# Altium PCB ESC_4layers.PcbDoc
Units mm, origin at the board's own origin, x right, y up, seen from the top; angles counter-clockwise.
Board outline 12.4 x 23 mm, 4 copper layers (Top Layer, Signal 1, Signal 2, Bottom Layer), stack 1.57 mm thick; 62 components, 45 nets, 240 pads, 90 vias.
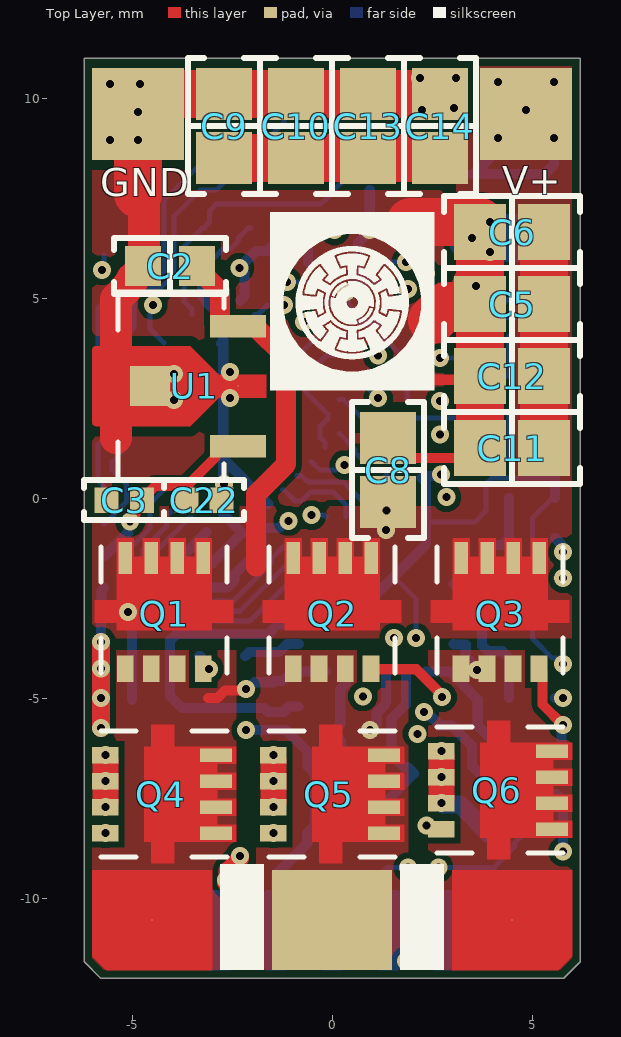
[diagram p0: Top Layer view]
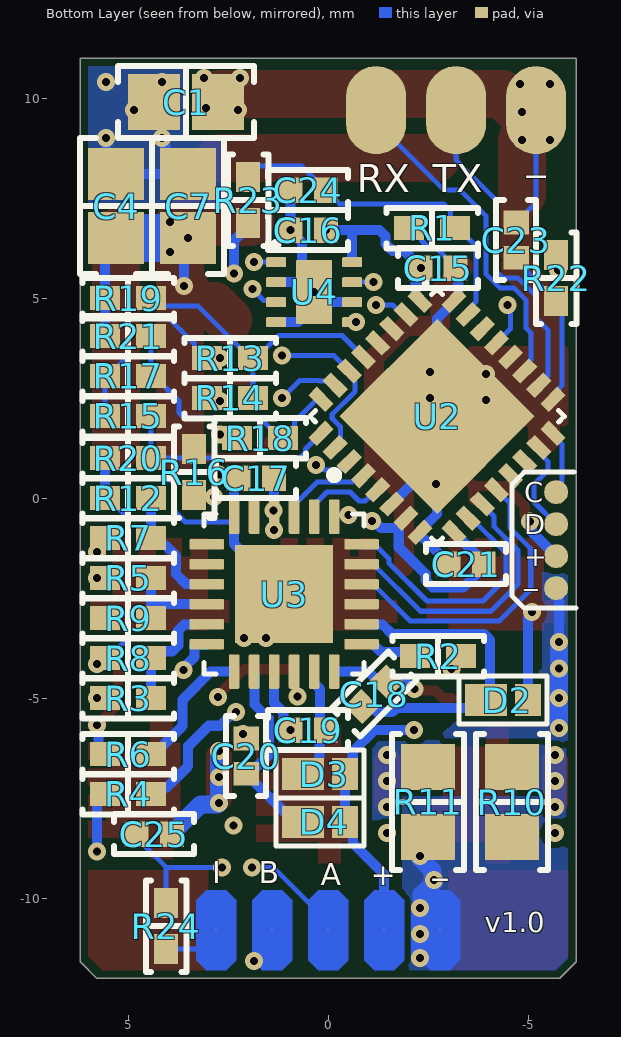
[diagram p1: Bottom Layer view, seen from below]
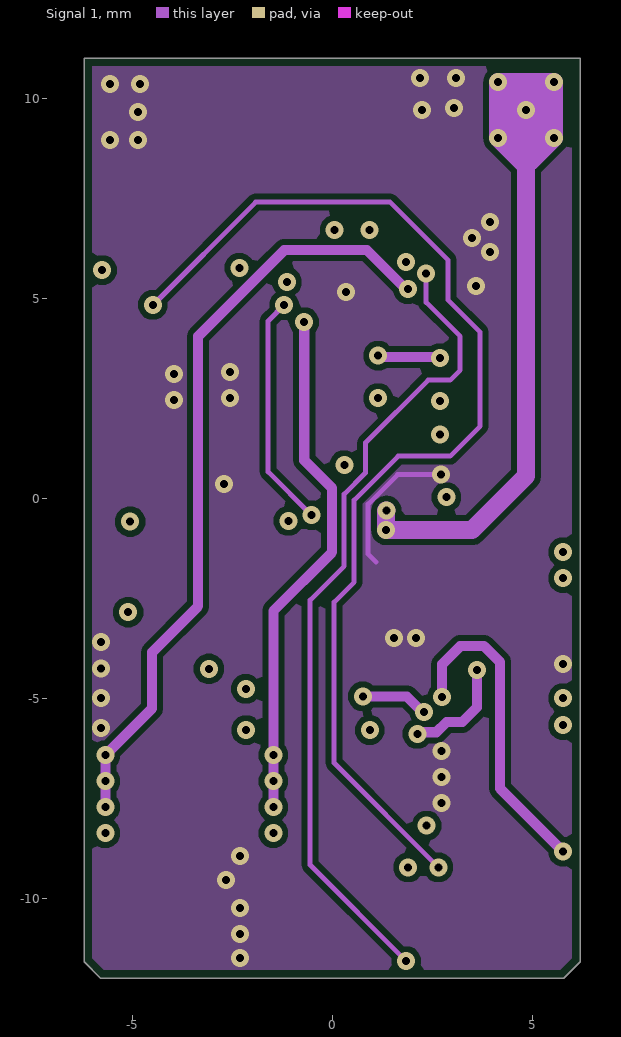
[diagram p2: Signal 1]
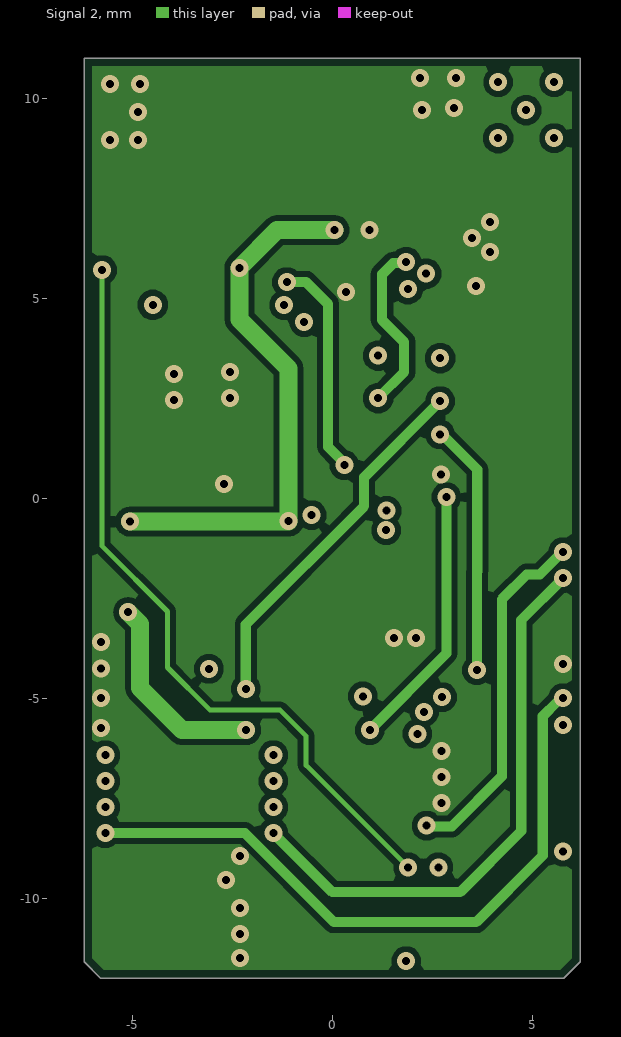
[diagram p3: Signal 2]

## Layer stack, top to bottom
Top Solder: solder mask 0.01, Solder Resist, Dk 3.5
Top Layer: signal copper 0.035
Dielectric 2: prepreg 0.2, PP-006, Dk 4.1
Signal 1: signal copper 0.0175
Core: core 1.065, FR-4, Dk 4.8
Signal 2: signal copper 0.0175
Dielectric 3: prepreg 0.2, PP-006, Dk 4.1
Bottom Layer: signal copper 0.035
Bottom Solder: solder mask 0.01, Solder Resist, Dk 3.5

## Board outline
-5.792,-12 -6.2,-11.592 -6.2,11 6.2,11 6.2,-11.592 5.792,-12

## Design rules (kind name [scope] priority, off if disabled: settings)
BoardOutlineClearance [OnLayer('Top Layer') Or (OnLayer('Bottom Layer')) Or (OnLayer('VBAT')) Or (OnLayer('Signal 1')) Or (OnLayer('Signal 2')) Or (OnLayer('Power')) Or (OnLayer('GND 1')) Or (OnLayer('GND 2')) Or (OnLayer('Multi-Layer'))] p1: gap=0.2 ignorepadtopadclearanceinfootprint=FALSE
Clearance "PolyGOn Pour CLearance" [InPolyGon] p1: gap=0.15 ignorepadtopadclearanceinfootprint=FALSE
Clearance [All] p2: gap=0.089 ignorepadtopadclearanceinfootprint=FALSE except(0.127: Arc-Via Track-Via SMDPad-Via THPad-Via Via-Via Via-Fill Via-Poly Via-Region Via-Text; 0.25: Arc-Hole Track-Hole SMDPad-Hole THPad-Hole Via-Hole Fill-Hole Poly-Hole Region-Hole Text-Hole)
HoleSize [All] p1: absolutevalues=TRUE maxlimit=6.3 minlimit=0.2 maxpercent=80.000 minpercent=20.000
PolygonConnect PolygonRelief [IsPolygon and not (IsNamedPolygon('PolygonDirect'))] p1: thpad.connectstyle=Relief thpad.reliefconductorwidth=0.254 thpad.reliefentries=4 thpad.polygonreliefangle="90 Angle" thpad.airgapwidth=0.254 smdpad.connectstyle=Relief smdpad.reliefconductorwidth=0.254 smdpad.reliefentries=4 smdpad.polygonreliefangle="90 Angle" smdpad.airgapwidth=0.254 via.connectstyle=Direct via.reliefconductorwidth=0.254 via.reliefentries=4 via.polygonreliefangle="90 Angle" via.airgapwidth=0.254
PolygonConnect [All] p2: connectstyle=Direct reliefconductorwidth=0.254 reliefentries=4 polygonreliefangle="90 Angle" airgapwidth=0.254
RoutingVias [All] p1: holewidth=0.3 width=0.55 viastyle="Through Hole" minholewidth=0.2 minwidth=0.45 maxholewidth=0.7 maxwidth=1.27
SolderMaskExpansion [All] p1: expansion=0.102 istentingtop=FALSE
Width [All] p1: maxlimit=5 minlimit=0.127 preferedwidth=0.254
29 further rules are at their usual default settings.

## Classes and differential pairs
component class U_STM32: C15 C16 C23 C24 C25 R1 R22 R23 R24 U2
component class U_Half_Bridge_Driver: C17 C18 C19 C20 C21 D2 D3 D4 Q1 Q2 Q3 Q4 Q5 Q6 R2 R3 R4 R5 R6 R7 R8 R9 R10 R11 R12 R13 R14 R15 R16 R17 R18 R19 R20 R21 U3 U4
component class U_3V3_LDO: C2 C3 C22 U1

## Components (designator, comment, footprint, x,y, rotation, side; value= is the part's Value field where it differs from the comment)
C1 "22 µF" "CAP 0805_2012" 3.55,9.9 r0 bottom
C2 "0.1µF" "CAP 0603_1608" -4.05,5.8 r180 top
C3 "0.1 µF" "CAP 0402_1005" -5.2,-0.05 r0 top
C4 "22 µF" "CAP 0805_2012" 5.3,7.3 r90 bottom
C5 "22 µF" "CAP 0805_2012" 4.5,4.85 r0 top
C6 "22 µF" "CAP 0805_2012" 4.5,6.65 r0 top
C7 "22 µF" "CAP 0805_2012" 3.5,7.3 r90 bottom
C8 "22 µF" "CAP 0805_2012" 1.4,0.7 r270 top
C9 "22 µF" "CAP 0805_2012" -2.7,9.3 r270 top
C10 "22 µF" "CAP 0805_2012" -0.9,9.3 r270 top
C11 "22 µF" "CAP 0805_2012" 4.5,1.25 r0 top
C12 "22 µF" "CAP 0805_2012" 4.5,3.05 r0 top
C13 "22 µF" "CAP 0805_2012" 0.9,9.3 r270 top
C14 "22 µF" "CAP 0805_2012" 2.7,9.3 r270 top
C15 "0.1 µF" "CAP 0402_1005" -2.75,5.75 r0 bottom
C16 "0.1 µF" "CAP 0402_1005" 0.5,6.7 r180 bottom
C17 "0.1 µF" "CAP 0402_1005" 1.8,0.5 r180 bottom
C18 "0.1 µF" "CAP 0402_1005" -1.15,-4.9 r135 bottom
C19 "0.1 µF" "CAP 0402_1005" 0.5,-5.8 r0 bottom
C20 "0.1 µF" "CAP 0402_1005" 2.05,-6.45 r90 bottom
C21 "0.1 µF" "CAP 0402_1005" -3.45,-1.65 r0 bottom
C22 "0.1 µF" "CAP 0402_1005" -3.2,-0.05 r180 top
C23 "0.1 nF" "CAP 0402_1005" -4.7,6.45 r90 bottom
C24 "0.1 nF" "CAP 0402_1005" 0.5,7.7 r0 bottom
C25 "0.1 nF" "CAP 0402_1005" 4.35,-8.4 r180 bottom
D2 "Diode" "Diode DFN1608D-2 (SOD1608)" -4.375,-5.05 r180 bottom
D3 "Diode" "Diode DFN1608D-2 (SOD1608)" 0.2,-6.9 r180 bottom
D4 "Diode" "Diode DFN1608D-2 (SOD1608)" 0.2,-8.1 r180 bottom
Q1 "NVTFS5C680NL" NVTFS015N04CTAG -4.2,-2.8 r90 top
Q2 "NVTFS5C680NL" NVTFS015N04CTAG 0,-2.8 r90 top
Q3 "NVTFS5C680NL" NVTFS015N04CTAG 4.2,-2.8 r90 top
Q4 "NVTFS5C680NL" NVTFS015N04CTAG -4.2,-7.4 r0 top
Q5 "NVTFS5C680NL" NVTFS015N04CTAG 0,-7.4 r0 top
Q6 "NVTFS5C680NL" NVTFS015N04CTAG 4.2,-7.3 r0 top
R1 "10k" "RES 0402_1005" -2.6,6.75 r180 bottom
R2 "22 Ohm" "RES 0402_1005" -2.75,-3.95 r180 bottom
R3 "22 Ohm" "RES 0402_1005" 5,-5 r0 bottom
R4 "22 Ohm" "RES 0402_1005" 5,-7.4 r0 bottom
R5 "22 Ohm" "RES 0402_1005" 5,-2 r0 bottom
R6 "22 Ohm" "RES 0402_1005" 5,-6.4 r0 bottom
R7 "22 Ohm" "RES 0402_1005" 5,-1 r0 bottom
R8 "10k" "RES 0402_1005" 5,-4 r0 bottom
R9 "10k" "RES 0402_1005" 5,-3 r0 bottom
R10 "15 mOhms" "RES 0805_2012" -4.6,-7.6 r90 bottom
R11 "15 mOhms" "RES 0805_2012" -2.5,-7.6 r90 bottom
R12 "10k" "RES 0402_1005" 5,0 r0 bottom
R13 "33 kOhms" "RES 0402_1005" 2.45,3.5 r180 bottom
R14 "33 kOhms" "RES 0402_1005" 2.45,2.5 r0 bottom
R15 "33 kOhms" "RES 0402_1005" 5,2.05 r180 bottom
R16 "33 kOhms" "RES 0402_1005" 3.35,0.65 r270 bottom
R17 "33 kOhms" "RES 0402_1005" 5,3.05 r180 bottom
R18 "33 kOhms" "RES 0402_1005" 1.7,1.5 r0 bottom
R19 "10 kOhms" "RES 0402_1005" 5,5 r180 bottom
R20 "10 kOhms" "RES 0402_1005" 5,1 r180 bottom
R21 "10 kOhms" "RES 0402_1005" 5,4.05 r180 bottom
R22 "470" "RES 0402_1005" -5.7,5.5 r270 bottom
R23 "470" "RES 0402_1005" 2,7.45 r90 bottom
R24 "470" "RES 0402_1005" 4.05,-10.7 r90 bottom
U1 "L78L33A" SOT-89-3 -3.8,2.8 r90 top
U2 "STM32G431KBU3" QFN50P400X400X60-32N -2.722,2.046 r225 bottom
U3 "FD6288Q" QFN50P400X400X100-25N 1.1,-2.4 r270 bottom
U4 "INA2180" WSON-8_2x2 0.35,5.15 r180 bottom

## Footprints (in the part's own frame and the unit in brackets; to place one, negate y for a bottom-side part, rotate by r counter-clockwise, add the part's x,y. Pads: shape width x height; smd on the part's side, far side on the other; paste and mask are expansions set on the pad)
"CAP 0402_1005" [mm] "Chip Capacitor, 2-Leads, Body 1.02x0.51mm, IPC Medium Density"
  rect 0.6x0.64 smd: 1(-0.44,0) 2(0.44,0)
  silkscreen extent -1,-0.5 1,0.5, body extent -0.5,-0.26 0.5,0.26, height 0.52
"CAP 0603_1608" [mm] "Chip Capacitor, 2-Leads, Body 1.60x0.80mm, IPC Medium Density"
  rect 0.9x1 smd: 1(-0.675,0) 2(0.675,0)
  silkscreen extent -1.4,-0.7 1.4,0.7, body extent -0.8,-0.41 0.8,0.41, height 0.82
"CAP 0805_2012" [mm] "Chip Capacitor, 2-Leads, Body 2.00x1.20mm, IPC Medium Density"
  rect 1.3x1.4 smd: 1(-0.8,0) 2(0.8,0)
  silkscreen extent -1.7,-0.9 1.7,0.9, body extent -1,-0.64 1,0.64, height 1.26
"Diode DFN1608D-2 (SOD1608)" [mm]
  rect 1.05x0.8 smd: 1(-0.425,0)
  rect 0.65x0.8 smd: 2(0.625,0)
  silkscreen extent -1.1,-0.6 1.1,0.6, body extent -0.8,-0.4 0.8,0.4, height 0.4
NVTFS015N04CTAG [mm]
  rect 0.66x0.42 smd: 1(-1.47,0.975) 2(-1.47,0.325) 3(-1.47,-0.325) 4(-1.47,-0.975)
  rect 0.8x0.34 smd: 5(1.3,-0.975) 6(1.3,-0.325) 7(1.3,0.325) 8(1.3,0.975)
  Top Layer region: -0.5,-1.185 -0.5,1.185 -0.32,1.185 -0.32,1.73 0.25,1.73 0.25,1.185 1.8,1.185 1.8,0.765 1.33,0.765 1.33,0.535 1.8,0.535 1.8,0.115 1.33,0.115 1.33,-0.115 1.8,-0.115 1.8,-0.535 1.33,-0.535 1.33,-0.765 1.8,-0.765 1.8,-1.185 0.25,-1.185 0.25,-1.73 -0.32,-1.73 -0.32,-1.185
  silkscreen extent -1.58,-1.58 1.58,1.58, body extent -1.7,-1.7 1.7,1.7, height 1.1
QFN50P400X400X60-32N [mm]
  rect 3.45x3.45 smd mask+0.051: 0(0,0)
  rect 0.6x0.3 smd mask+0.051: 1(-2.35,1.75) 2(-2.35,1.25) 3(-2.35,0.75) 4(-2.35,0.25) 5(-2.35,-0.25) 6(-2.35,-0.75) 7(-2.35,-1.25) 8(-2.35,-1.75) 17(2.35,-1.75) 18(2.35,-1.25) 19(2.35,-0.75) 20(2.35,-0.25) 21(2.35,0.25) 22(2.35,0.75) 23(2.35,1.25) 24(2.35,1.75)
  rect 0.3x0.6 smd mask+0.051: 9(-1.75,-2.35) 10(-1.25,-2.35) 11(-0.75,-2.35) 12(-0.25,-2.35) 13(0.25,-2.35) 14(0.75,-2.35) 15(1.25,-2.35) 16(1.75,-2.35) 25(1.75,2.35) 26(1.25,2.35) 27(0.75,2.35) 28(0.25,2.35) 29(-0.25,2.35) 30(-0.75,2.35) 31(-1.25,2.35) 32(-1.75,2.35)
  silkscreen extent -2.6,-2.25 2.25,2.25, body extent -2.25,-2.25 2.25,2.25, height 0.68
QFN50P400X400X100-25N [mm]
  rrect25% 0.86x0.27 smd: 1(-1.935,1.25) 2(-1.935,0.75) 3(-1.935,0.25) 4(-1.935,-0.25) 5(-1.935,-0.75) 6(-1.935,-1.25) 13(1.935,-1.25) 14(1.935,-0.75) 15(1.935,-0.25) 16(1.935,0.25) 17(1.935,0.75) 18(1.935,1.25)
  rrect25% 0.27x0.86 smd: 7(-1.25,-1.935) 8(-0.75,-1.935) 9(-0.25,-1.935) 10(0.25,-1.935) 11(0.75,-1.935) 12(1.25,-1.935) 19(1.25,1.935) 20(0.75,1.935) 21(0.25,1.935) 22(-0.25,1.935) 23(-0.75,1.935) 24(-1.25,1.935)
  rect 2.45x2.45 smd paste-0.45: 25(0,0)
  silkscreen extent -3.07,-2 2,2, body extent -2,-2 2,2, height 1
"RES 0402_1005" [mm] "Chip Resistor, 2-Leads, Body 1.0x0.5mm, IPC Medium Density"
  rect 0.75x0.6 smd: 1(-0.575,0) 2(0.575,0)
  silkscreen extent -1.14,-0.51 1.14,0.51, body extent -0.5,-0.25 0.5,0.25, height 0.35
"RES 0805_2012" [mm] "Chip Resistor, 2-Leads, Body 2.00x1.25mm, IPC Medium Density"
  rect 1.15x1.35 smd: 1(-0.875,0) 2(0.875,0)
  silkscreen extent -1.7,-0.9 1.7,0.9, body extent -1,-0.62 1,0.63, height 0.6
SOT-89-3 [mm]
  rect 0.57x1.4 smd: 1(-1.5,-1.45) 3(1.5,-1.45)
  rect 1x1 smd: 2(0,0.75)
  round 0.025 smd: 2(0,-1.45)
  Top Layer region: -0.285,-2.15 -0.285,-0.965 -1,-0.25 -1,2.1 -0.992,2.138 -0.971,2.171 -0.938,2.192 -0.9,2.2 -0.9,2.2 0.9,2.2 0.938,2.192 0.971,2.171 0.992,2.138 1,2.1 1,2.1 1,-0.25 0.285,-0.965 0.285,-2.15
  silkscreen extent -2.35,-1.1 2.35,1.55, body extent -2.25,-2.02 2.25,2.08, height 1.6
WSON-8_2x2 [mm]
  rrect25% 0.5x0.25 smd: 1(-0.95,0.75) 2(-0.95,0.25) 3(-0.95,-0.25) 4(-0.95,-0.75) 5(0.95,-0.75) 6(0.95,-0.25) 7(0.95,0.25) 8(0.95,0.75)
  rrect5% 0.9x1.6 smd paste-2: 9(0,0)
  silkscreen extent -1.01,1.14 -0.89,1.26, body extent -1,-1 1,1, height 0.8

## Part data
C1 C4 C5 C6 C7 C8 C9 C10 C11 C12 C13 C14: library part CC0805MKX5R8BB226, "CAP CER 22UF 25V X5R 0805", Device Package="0805 (2012 Metric)", Manufacturer=Yageo, Operating Temperature="-55°C ~ 85°C", Supplier Part Number 1=311-1903-1-ND, Temperature Coefficient=X5R, Tolerance=±20%, Voltage - Rated=25V, Applications="General Purpose", Capacitance="22 µF", ComponentLink1Description=Datasheet, ComponentLink1URL=https://www.yageo.com/upload/media/product/productsearch/datasheet/mlcc/UPY-GPHC_X5R_4V-to-50V_25.pdf, ComponentLink2Description="DigiKey Link", ComponentLink2URL=https://www.digikey.com/en/products/detail/yageo/CC0805MKX5R8BB226/5195309, LastUpdated="8/21/2022 8:03:23 PM", Lifecycle Status=Active, Minimum Order=1, Mounting Type="Surface Mount, MLCC", Package / Case="0805 (2012 Metric)", Packaging=TapeAndReel, Part Number=CC0805MKX5R8BB226, Part Status=Active, PartId=39226, Price=0.10, Series=CC, Size / Dimension="0.079\" L x 0.049\" W (2.00mm x 1.25mm)", Supplier 1=DigiKey, Thickness (Max)="0.057\" (1.45mm)"
C2: library part GCG188R92A104KA03D, "CAP CER 0.1UF 100V 0603 EPOXY", Device Package="0603 (1608 Metric)", Manufacturer="Murata Electronics", Operating Temperature="-55°C ~ 150°C", Ratings=AEC-Q200, Supplier Part Number 1=490-18197-1-ND, Temperature Coefficient=X8R, Tolerance=±10%, Voltage - Rated=100V, Applications=Automotive, Capacitance=0.1µF, ComponentLink1Description=Datasheet, ComponentLink1URL=https://search.murata.co.jp/Ceramy/image/img/A01X/G101/ENG/GCG188R92A104KA03-01.pdf, ComponentLink2Description="DigiKey Link", ComponentLink2URL=http://digikey.com/product-detail/en/murata-electronics/GCG188R92A104KA03D/490-18197-1-ND/9867926, Features="Epoxy Mountable", LastUpdated="21-Jan-20 12:01:59 AM", Lifecycle Status=Active, Minimum Order=1, Mounting Type="Surface Mount, MLCC, Epoxy", Package / Case="0603 (1608 Metric)", Packaging=TapeAndReel, Part Number=GCG188R92A104KA03D, Part Status=Active, PartId=9025, Price=0.07, Series=GCG, Size / Dimension="0.063\" L x 0.031\" W (1.60mm x 0.80mm)", Supplier 1=DigiKey, Thickness (Max)="0.035\" (0.90mm)"
C3 C15 C16 C17 C18 C19 C20 C21 C22: library part C0402C104K4RACAUTO, "CAP CER 0.1UF 16V X7R 0402", Device Package="0402 (1005 Metric)", Manufacturer=KEMET, Operating Temperature="-55°C ~ 125°C", Ratings=AEC-Q200, Supplier Part Number 1=399-6828-1-ND, Temperature Coefficient=X7R, Tolerance=±10%, Voltage - Rated=16V, Applications="Automotive, Bypass, Decoupling", Capacitance="0.1 µF", ComponentLink1Description=Datasheet, ComponentLink1URL=https://api.kemet.com/component-edge/download/specsheet/C0402C104K4RACAUTO.pdf, ComponentLink2Description="DigiKey Link", ComponentLink2URL=https://www.digikey.com/en/products/detail/kemet/C0402C104K4RACAUTO/3314827, LastUpdated="8/14/2022 9:05:51 PM", Lifecycle Status=Active, Minimum Order=1, Mounting Type="Surface Mount, MLCC", Package / Case="0402 (1005 Metric)", Packaging=TapeAndReel, Part Number=C0402C104K4RACAUTO, Part Status=Active, PartId=3024, Price=0.01, Series="SMD Auto X7R", Size / Dimension="0.039\" L x 0.020\" W (1.00mm x 0.50mm)", Supplier 1=DigiKey, Thickness (Max)="0.022\" (0.55mm)"
C23 C24 C25: library part C0402C104K4RACAUTO, "CAP CER 0.1UF 16V X7R 0402", Capacitance="0.1 µF", Device Package="0402 (1005 Metric)", Manufacturer=KEMET, Operating Temperature="-55°C ~ 125°C", Ratings=AEC-Q200, Supplier Part Number 1=399-6828-1-ND, Temperature Coefficient=X7R, Tolerance=±10%, Voltage - Rated=16V, Applications="Automotive, Bypass, Decoupling", ComponentLink1Description=Datasheet, ComponentLink1URL=https://api.kemet.com/component-edge/download/specsheet/C0402C104K4RACAUTO.pdf, ComponentLink2Description="DigiKey Link", ComponentLink2URL=https://www.digikey.com/en/products/detail/kemet/C0402C104K4RACAUTO/3314827, LastUpdated="8/14/2022 9:05:51 PM", Lifecycle Status=Active, Minimum Order=1, Mounting Type="Surface Mount, MLCC", Package / Case="0402 (1005 Metric)", Packaging=TapeAndReel, Part Number=C0402C104K4RACAUTO, Part Status=Active, PartId=3024, Price=0.01, Series="SMD Auto X7R", Size / Dimension="0.039\" L x 0.020\" W (1.00mm x 0.50mm)", Supplier 1=DigiKey, Thickness (Max)="0.022\" (0.55mm)"
D2 D3 D4: "DFN1608D-2 (SOD1608)", Digikey Part Number=CLV1L-FKB-CHMMQEHBB7673673-ND, Manufacturer=Cree, Mouser Part Number=941-CLV1LFKBC7673673, Package=LED_3MM2X2MM8, Temperature="-40°C to +100°C", Temperature Range High=+100°C, Temperature Range Low=-40°C, ComponentLink1Description=Upverter, ComponentLink1URL=https://upverter.com/upn/revision/9d0b31f7b1982705/, ComponentLink2Description=Datasheet, ComponentLink2URL=http://www.cree.com/~/media/Files/Cree/LED-Components-and-Modules/HB/Data-Sheets/CLV1L-FKB-1238.pdf, Digikey Description="DIODE LED RGB DIFFUSED 4LCC SMD", Lead Free=yes, Price=0.203999996142, RoHS=TRUE, Supplier 1=Digi-Key, Supplier 2=Mouser, Supplier Part Number 1=CLV1L-FKB-CHMMQEHBB7673673-ND, Supplier Part Number 2=941-CLV1LFKBC7673673
Q1 Q2 Q3 Q4 Q5 Q6: "N-FET"
R1 R2 R3 R4 R5 R6 R7 R8 R9 R12 R13 R14 R15 R16 R17 R18 R19 R20 R21 R22 R23 R24: library part RK73H1ETTP1432F, "RES 14.3K OHM 1% 1/10W 0402", Device Package="0402 (1005 Metric)", Manufacturer="KOA Speer Electronics, Inc.", Operating Temperature="-55°C ~ 155°C", Power (Watts)="0.1W, 1/10W", Ratings=AEC-Q200, Resistance="14.3 kOhms", Supplier Device Package=0402, Supplier Part Number 1=2019-RK73H1ETTP1432FCT-ND, Temperature Coefficient=±100ppm/°C, Tolerance=±1%, ComponentLink1Description=Datasheet, ComponentLink1URL=http://www.koaspeer.com/catimages/Products/RK73H/RK73H.pdf, ComponentLink2Description="DigiKey Link", ComponentLink2URL=https://www.digikey.com/en/products/detail/koa-speer-electronics-inc/RK73H1ETTP1432F/9844351, Composition="Thick Film", Features="Automotive AEC-Q200, Moisture Resistant", Height - Seated (Max)="0.016\" (0.40mm)", LastUpdated="8/14/2022 9:23:49 PM", Lifecycle Status=Active, Minimum Order=1, Number of Terminations=2, Package / Case="0402 (1005 Metric)", Packaging=CutTape, Part Number=RK73H1ETTP1432F, Part Status=Active, PartId=10193, Price=0.01, Series=RK73H, Size / Dimension="0.039\" L x 0.020\" W (1.00mm x 0.50mm)", Supplier 1=DigiKey
R10 R11: library part PCAN0805E2002BST5, "RES SMD 20K OHM 0.1% 1W 0805", Device Package="0805 (2012 Metric)", Manufacturer="Vishay Thin Film", Operating Temperature="-55°C ~ 155°C", Power (Watts)=1W, Resistance="20 kOhms", Supplier Device Package=0805, Supplier Part Number 1=764-1242-1-ND, Temperature Coefficient=±25ppm/°C, Tolerance=±0.1%, ComponentLink1Description=Datasheet, ComponentLink1URL=http://www.vishay.com/docs/60125/pcan.pdf, ComponentLink2Description="DigiKey Link", ComponentLink2URL=http://digikey.com/product-detail/en/vishay-thin-film/PCAN0805E2002BST5/764-1242-1-ND/6003316, Composition="Thin Film", Features="Flame Proof, Moisture Resistant, Safety", Height - Seated (Max)="0.018\" (0.46mm)", LastUpdated="8/26/2022 12:02:22 PM", Lifecycle Status=Active, Minimum Order=1, Number of Terminations=2, Package / Case="0805 (2012 Metric)", Packaging=TapeAndReel, Part Number=PCAN0805E2002BST5, Part Status=Active, PartId=32096, Price=0.59, Series=PCAN, Size / Dimension="0.080\" L x 0.050\" W (2.03mm x 1.27mm)", Supplier 1=DigiKey
U1: "3.3V LDO"
U2: "MCU UFQFPN-32"
U3: "3 Phase Gate Driver 1.5-2.2A", Package="VSON-10 Texas Instruments", Availability=Warning, DigiKey-Purchase-URL=https://snapeda.com/shop?store=DigiKey&id=3625400, MF="Texas Instruments", MP=UCC27282DRCR, Price=None, SnapEDA_Link=https://www.snapeda.com/parts/UCC27282DRCR/Texas%20Instruments/view-part/3625400/?ref=snap, Texas_Instruments-Purchase-URL=https://snapeda.com/shop?store=Texas+Instruments&id=3625400
U4: "Current sense amplifier 4 channel"

## Free pads (board coordinates)
  oval 1.5x2.2 smd far side: 3(-5.2,9.7) 3(-3.2,9.7) 3(-1.2,9.7)
  rect 2.3x2.3 smd: 3(-4.85,9.6) 3(4.85,9.6)
  round 0.025 smd: 3(-4.5,-10.55) 3(4.5,-10.55)
  rect 3x2.5 smd: 3(0,-10.55)
  round 0.6 smd far side: 4(-5.7,-2.25) 4(-5.7,-1.45) 4(-5.7,-0.65) 4(-5.7,0.15)
  round 0.025 smd far side: 4(-2.8,-10.8) 4(-1.4,-10.8) 4(0,-10.8) 4(1.4,-10.8) 4(2.8,-10.8)

## Via types
v1: diameter 0.45, hole 0.2, Top Layer to Bottom Layer, tented both sides, 90 vias

## Nets (pads, with @x,y where several pads share a name; then routed paths per layer and width w, separated by ;. In a path a pad name is that pad's centre, name@x,y a point inside that pad or via, vN(x,y) a via of type N, cw(c..) or ccw(c..) an arc to the next point about the centre after c; other vN are vias at no path point)
3V3: C3.2 C15.2 C16.2 C21.1 C22.2 pad.4@-5.7,-1.45 U1.1 U2.1 U2.15 U2.17 U4.8 | length 28.8
  Top Layer w0.254: v1(-5.051,-0.589) -5.051,-0.535 -4.916,-0.401 -4.916,-0.206 C3.2 -4.76,-0.03 -4.43,0.3 -3.64,0.3 ; C22.2 -3.64,0.3 ; U1.1 -2.765,1.3 -2.923,1.142 -2.923,1.017 -3.64,0.3
  Signal 2 w0.45: v1(-5.051,-0.589) -1.091,-0.589 v1(-1.091,-0.569) -1.091,3.241 -2.319,4.469 v1(-2.319,5.759) -1.377,6.7 v1(0.06,6.7)
  Bottom Layer w0.254: pad.4@-5.7,-1.45 -5.088,-0.838 -5.088,-0.626 v1(-5.051,-0.589) ; U2.17 -3.717,-1.424 -3.717,-1.477 C21.1 -3.717,-1.823 -3.717,-1.898 -3.384,-2.231 -2.612,-2.231 -2.441,-2.061 -2.441,-1.904 -1.764,-1.226 -1.764,-0.681 U2.15 ; v1(-2.319,5.759) C15.2@-2.31,5.759 ; U2.1 -2.192,5.051 -2.192,5.632 C15.2 C15.2@-2.31,5.759 ; -1.662,-0.75 -1.325,-0.75 -1.144,-0.569 v1(-1.091,-0.569) ; U4.8 -0.6,6.7 ; v1(0.06,6.7) -0.6,6.7 ; C15.2@-2.31,5.759 -2.31,5.77 -1.899,6.181 -1.614,6.181 -1.434,6.361 -1.434,6.551 -1.285,6.7 -0.6,6.7
BSTA: C18.1 D2.1 U3.20 | length 8.2
  Bottom Layer w0.254: C18.1 -1.084,-5.211 -1.222,-5.35 -1.6,-5.35 -1.7,-5.25 -3.75,-5.25 D2.1 -4.05,-4.95 -4.05,-3.55 -3.9,-3.4 -1.6,-3.4 -1.358,-3.158 -0.843,-3.158 U3.20
BSTB: C19.1 D3.1 U3.17 | length 3
  Bottom Layer w0.254: C19.1@0,-5.86 0.219,-6.079 0.219,-6.478 0.227,-6.486 0.227,-6.627 0.5,-6.9 D3.1 ; C19.1 0.201,-5.659 0.201,-4.779 0.35,-4.63 U3.17
BSTC: C20.1 D4.1 U3.14 | length 4.9
  Bottom Layer w0.254: D4.1 0.898,-7.827 1.113,-7.827 1.857,-7.083 1.857,-7.063 2.03,-6.89 C20.1 1.877,-6.717 1.782,-6.717 1.485,-6.42 1.485,-5.515 1.842,-5.158 1.842,-4.343 U3.14
DIN: pad.3@-1.2,9.7 U2.27 | length 8.6
  Bottom Layer w0.127: U2.27 -4.914,3.299 -5.068,3.453 -5.068,4.138 -4.95,4.256 -4.95,4.95 -4.65,5.25 -4.3,5.25 -3.95,5.6 -3.95,7.05 -3.3,7.7 -2.9,7.7 -1.2,9.4 pad.3@-1.2,9.7
DOUT: pad.3@-3.2,9.7 U2.26 | length 8.2
  Bottom Layer w0.127: U2.26 -5.5,3.056 -5.5,4.2 -5.2,4.5 -5.2,5.05 -4.75,5.5 -4.374,5.5 -4.2,5.674 ; -4.2,5.7 -4.2,5.674 ; pad.3@-3.2,9.7 -3.2,8.45 -4.2,7.45 -4.2,5.674
ENC_A: pad.4@0,-10.8 R22.1 | length 22.5
  Signal 2 w0.127: v1(-5.75,5.7) -5.75,-1.2 -4.115,-2.835 -4.115,-4.235 -3.05,-5.3 -1.3,-5.3 -0.65,-5.95 -0.65,-6.679 v1(1.9,-9.229)
  Bottom Layer w0.127: v1(-5.75,5.7) -5.7,5.75 R22.1 ; 0,-11.134 0,-10.6 1.371,-9.229 v1(1.9,-9.229)
ENC_A_R: C23.1 R22.2 U2.25 | length 4.2
  Bottom Layer w0.127: U2.25 -5.621,2.592 -5.85,2.821 -5.85,4.775 R22.2 -5.7,5 -5.463,5.236 -5.388,5.236 -4.957,5.668 -4.957,5.774 -4.72,6.01 C23.1
ENC_B: pad.4@1.4,-10.8 R23.1 | length 22.6
  Signal 1 w0.127: v1(1.852,-11.575) -0.55,-9.173 -0.55,-2.55 0.3,-1.7 0.3,0.1 0.836,0.636 0.836,1.386 2.4,2.95 2.95,2.95 3.2,3.2 3.2,4.045 2.35,4.895 v1(2.35,5.612)
  Bottom Layer w0.127: 1.75,-10.8 1.75,-11.093 1.817,-11.16 1.817,-11.54 v1(1.852,-11.575)
  Bottom Layer w0.254: R23.1 2,6.8 2.35,6.45 v1(2.35,5.612)
ENC_B_R: C24.1 R1.2 R23.2 U2.31 | length 8.7
  Bottom Layer w0.127: U2.31 -3.5,4.714 -3.7,4.914 -3.7,6.296 -3.487,6.509 -3.487,6.513 -3.25,6.75 R1.2 ; R1.2@-3.216,6.75 -3.063,6.902 -3.063,7.086 -3.06,7.09 -3.06,7.19 -2.9,7.35 -0.29,7.35 -0.197,7.443 -0.176,7.443 0.06,7.68 0.06,7.72 0.296,7.957 0.317,7.957 0.66,8.3 1.764,8.3 2,8.064 R23.2
ENC_I: pad.4@2.8,-10.8 R24.1 | length 1.4
  Bottom Layer w0.127: pad.4@2.8,-10.8 3.275,-11.275 R24.1
ENC_I_R: C25.1 R24.2 U2.29 | length 32.5
  Signal 1 w0.127: v1(-4.481,4.831) -1.912,7.4 1.45,7.4 2.9,5.95 2.9,4.95 3.7,4.15 3.7,1.8 2.95,1.05 1.65,1.05 0.55,-0.05 0.55,-2.1 0.05,-2.6 0.05,-6.624 v1(2.655,-9.229)
  Bottom Layer w0.127: v1(-4.481,4.831) -4.481,4.744 -4.554,4.671 -4.554,4.231 U2.29 ; v1(2.655,-9.229) 4.05,-9.229 ; R24.2 4.05,-9.229 ; C25.1 4.553,-8.637 4.553,-8.726 4.05,-9.229
GHA: R2.1 U3.19 | length 1.5
  Bottom Layer w0.254: R2.1 -2.075,-3.85 -1.33,-3.85 -1.13,-3.65 U3.19
GHB: R4.1 U3.16 | length 5
  Signal 1 w0.254: v1(0.77,-4.958) 1.866,-4.958 2.248,-5.34 v1(2.301,-5.34)
  Bottom Layer w0.254: v1(2.301,-5.34) 2.354,-5.34 2.703,-5.689 2.989,-5.689 3.5,-6.2 3.5,-6.7 4.027,-7.227 4.252,-7.227 R4.1
GHC: R6.1 U3.13 | length 3.3
  Bottom Layer w0.254: U3.13 2.935,-4.335 3.638,-5.038 3.638,-5.688 4.35,-6.4 R6.1
GLA: R3.1 R8.1 U3.11 | length 2.7
  Bottom Layer w0.254: U3.11@3.338,-3.158 3.6,-3.158 3.748,-3.307 3.748,-3.678 3.897,-3.827 4.252,-3.827 R8.1 R3.1
GLB: R5.1 R9.1 U3.10 | length 2.5
  Bottom Layer w0.254: U3.10 4.375,-2.65 4.425,-2.7 ; R9.1@4.35,-3 R9.1 4.425,-2.7 ; R5.1 4.425,-2.7
GLC: R7.1 R12.1 U3.9 | length 3.1
  Bottom Layer w0.254: U3.9 3.043,-2.142 3.558,-2.142 3.805,-1.895 3.805,-1.444 4.076,-1.173 4.252,-1.173 R7.1 R12.1
GND: C1.1 C2.2 C3.1 C4.1 C5.1 C6.1 C7.1 C8.1 C9.1 C10.1 C11.1 C12.1 C13.1 C14.1 C15.1 C16.1 C17.1 C21.2 C22.1 C23.2 C24.2 C25.2 pad.3@-4.85,9.6 pad.3@-5.2,9.7 pad.4@-2.8,-10.8 pad.4@-5.7,-2.25 Q6.1 Q6.2 Q6.3 R1.1 R8.2 R9.2 R10.1 R11.1 R12.2 R19.1 R20.1 R21.1 U1.2 U2.0 U2.14 U2.16 U2.32 U3.6 U3.25 U4.2 U4.4 U4.6 U4.9 | length 91.4
  Top Layer w0.127: v1(-4.85,8.95) -4.85,9.6 v1(-4.85,9.65)
  Top Layer w0.254: C22.1 -2.73,-0.02 -2.73,0.32 v1(-2.7,0.35) ; C8.1 1.9,1 3.45,1 C11.1 ; 1.964,2.958 3.608,2.958 C12.1
  Top Layer w0.45: v1(-5.775,-5.741) v1(-5.775,-3.6) ; v1(-2.3,-11.5) v1(-2.3,-10.9) v1(-2.3,-10.25) -2.338,-10.212 -2.338,-9.914 -2.648,-9.603 v1(-2.648,-9.55) -2.61,-9.512 -2.61,-9.314 -2.3,-9.003 v1(-2.3,-8.95)
  Top Layer w0.65: Q6.3@2.73,-7.497 v1(2.73,-6.975) Q6.1@2.73,-6.458
  Top Layer w0.8: -5.4,1.5 -5.4,4.976 -5.126,5.25 -5.126,5.276 -4.998,5.403 -4.998,5.477 -4.725,5.75 C2.2 ; C2.2@-4.7,6.15 -4.7,7.35
  Top Layer w1.2: -4.85,7.6 v1(-4.85,8.95) ; pad.3@-4.85,9.6 -4.35,10.1 C9.1 C10.1 C13.1 C14.1 ; 1.957,6.9 C6.1@3.7,6.9 ; 2.5,4.45 2.85,4.8 3.65,4.8 C5.1 ; v1(3.6,5.3) 3.6,4.95 C5.1 ; C11.1 C12.1 C5.1 ; C5.1@3.7,4.9 C6.1
  Signal 1 w0.127: 1.1,-1.6 0.9,-1.4 0.9,-0.15 1.638,0.588 v1(2.726,0.588)
  Bottom Layer w0.127: pad.3@-5.2,9.7 -5.2,9.3 -5.2,7.39 -4.957,7.147 -4.957,7.127 -4.72,6.89 C23.2 ; C15.1@-3.426,6.007 C15.1@-3.19,5.77 ; C15.1@-3.253,5.687 C15.1 C15.1@-3.19,5.77 ; R1.1 -2.1,6.75 -2.337,6.513 -2.337,6.438 -2.531,6.244 -2.716,6.244 C15.1@-3.19,5.77 ; U3.25@1.537,-1.963 2.1,-2.526 v1(2.1,-3.5) ; U3.6@2.342,-0.52 2.422,-0.6 3.566,-0.6 3.848,-0.317 3.848,0.359 3.989,0.5 5.575,0.5 ; R9.2 5.475,-2.9 5.007,-2.9 ; R12.2 5.5,0 5.007,-0.493 5.007,-2.9 ; v1(5.775,-4.15) 5.625,-4 R8.2 5.5,-4 5.007,-3.507 5.007,-2.9
  Bottom Layer w0.254: v1(-5.775,-3.6) -5.775,-2.57 -5.766,-2.561 -5.766,-2.316 pad.4@-5.7,-2.25 ; pad.3@-5.2,9.3 v1(-4.85,8.95) ; C15.1@-3.253,5.687 -3.253,5.051 U2.32 -3.146,4.912 -2.722,4.488 U2.0@-2.722,3.863 ; C21.2 -3.01,-1.63 -2.282,-0.902 -2.282,-0.869 U2.16 -2.298,-0.821 -2.722,-0.397 U2.0@-2.722,0.985 ; U2.0@-2.772,3.863 U2.0@-2.722,3.863 ; U2.14 U2.0@-2.722,0.985 ; U4.6 0.1,4.9 v1(0.35,5.15) ; U4.9@0.55,5.4 U4.9@0.6,5.4 ; C24.2 v1(0.94,6.7) 0.94,6.68 0.651,6.391 0.651,5.451 U4.9@0.6,5.4 ; U3.25 1.537,-1.963 2.35,-1.15 U3.6@2.35,-0.52 ; U4.4@1.177,4.402 0.748,4.402 0.35,4.8 v1(0.35,5.15) ; U4.2 U4.9@0.6,5.4 ; C17.1 2.29,0.55 2.688,0.55 v1(2.726,0.588) ; C17.1@2.244,0.496 2.35,0.39 U3.6 ; v1(3.5,6.5) 3.6,6.4 v1(3.6,5.3) v1@3.653,5.3 ; C4.1 5.575,6.225 R19.1 ; R19.1@5.5,5 R19.1 ; R12.2 5.575,0.5 R20.1 ; R21.1 R19.1 ; U2.0@-2.722,0.985 U2.0 U2.0@-2.722,3.863 ; v1(0.35,5.15) U4.9@0.6,5.4
  Bottom Layer w0.45: v1(-5.775,-5.741) v1(-5.775,-3.6) ; v1(-2.3,-11.5) v1(-2.3,-10.9) v1(-2.3,-10.25) -2.338,-10.212 -2.338,-9.914 -2.648,-9.603 v1(-2.648,-9.55) -2.61,-9.512 -2.61,-9.314 -2.3,-9.003 v1(-2.3,-8.95) ; v1(2.73,-6.325) v1(2.73,-6.975) v1(2.73,-7.625) 2.768,-7.663 3.193,-7.663 3.91,-8.38 C25.2
  Bottom Layer w1.2: v1(3.5,6.5) C4.1
  other v1: -5.775,-5 -5.775,-4.263 1.55,-3.5 -3.95,2.45 -2.55,2.5 -3.95,3.1 -2.55,3.15 3.95,6.15 3.95,6.9 -5.55,8.95 2.25,9.7 3.05,9.75 -5.55,10.35 -4.8,10.35 2.2,10.5 3.1,10.5
GU_H: Q1.4 R2.2 | length 0.4
  Bottom Layer w0.254: R2.2 -3.289,-3.95 -3.116,-4.123 -3.116,-4.21 R2.2@-3.079,-4.248
  other v1: -3.079,-4.27
GU_L: Q4.4 R3.2 | length 16.9
  Signal 2 w0.254: v1(-5.67,-8.375) -2.181,-8.375 0.044,-10.6 3.6,-10.6 5.267,-8.933 5.267,-5.45 5.621,-5.096 5.624,-5.096 5.722,-4.998 v1(5.775,-4.998)
  Bottom Layer w0.254: R3.2 5.577,-4.998 v1(5.775,-4.998)
GV_H: Q2.4 R4.2 | length 11.7
  Top Layer w0.254: Q2.4 1.051,-4.27 1.058,-4.277 2.103,-4.277 2.749,-4.924 v1(2.749,-4.977)
  Signal 1 w0.254: v1(2.749,-4.977) 2.749,-4.151 3.2,-3.7 3.8,-3.7 4.2,-4.1 4.2,-7.262 v1(5.775,-8.837)
  Bottom Layer w0.254: R4.2 5.602,-7.4 5.775,-7.573 v1(5.775,-8.837)
GV_L: Q5.4 R5.2 | length 14.4
  Signal 2 w0.254: v1(-1.47,-8.375) 0.005,-9.85 3.2,-9.85 4.727,-8.323 4.727,-3.048 v1(5.775,-2)
  Bottom Layer w0.127: R5.2 v1(5.775,-2)
GW_H: Q3.4 R6.2 | length 2.5
  Top Layer w0.254: Q3.4 5.257,-4.352 5.257,-5.158 v1(5.775,-5.675)
  Bottom Layer w0.254: R6.2 5.738,-6.237 5.738,-5.713 v1(5.775,-5.675)
GW_L: Q6.4 R7.2 | length 9.3
  Signal 2 w0.254: v1(2.362,-8.185) 2.382,-8.205 2.995,-8.205 4.244,-6.956 4.244,-2.531 4.866,-1.909 5.188,-1.909 5.75,-1.348 v1(5.775,-1.348)
  Bottom Layer w0.254: R7.2 5.738,-1.163 5.738,-1.31 v1(5.775,-1.348)
ISNS_U: U2.7 U4.1 | length 6.4
  Signal 2 w0.254: v1(1.148,2.502) 1.8,3.154 1.8,3.9 1.25,4.45 1.25,5.6 1.525,5.875 1.825,5.875 v1(1.85,5.9)
  Bottom Layer w0.127: U2.7 -0.105,2.823 0.001,2.929 0.209,2.929 0.22,2.94 0.71,2.94 v1(1.148,2.502) ; U4.1 v1(1.85,5.9)
ISNS_V: U2.11 U4.7 | length 6.9
  Signal 2 w0.254: v1@-1.08,5.407 -0.657,5.407 -0.1,4.85 -0.1,1.279 0.303,0.877 v1(0.303,0.825)
  Bottom Layer w0.127: v1(-1.13,5.4) U4.7 ; U2.11 -0.514,0.914 -0.3,0.7 0.09,0.7 0.215,0.825 v1(0.303,0.825)
OUT_U: C18.2 pad.3@-4.5,-10.55 Q1.1 Q1.2 Q1.3 Q4.5 Q4.6 Q4.7 Q4.8 R14.2 U3.18 | length 12.4
  Top Layer w0.254: -3.1,-5 -2.873,-5 -2.681,-4.809 -2.196,-4.809 v1(-2.158,-4.771)
  Signal 2 w0.254: v1(-2.158,-4.771) -2.158,-3.158 0.8,-0.2 0.8,0.526 v1(2.698,2.424)
  Bottom Layer w0.254: v1(-2.158,-4.771) -2.105,-4.771 -1.937,-4.603 -1.475,-4.603 C18.2 ; C18.2@-1.447,-4.575 -1.241,-4.575 -1.001,-4.335 U3.18
OUT_V: C19.2 pad.3@0,-10.55 Q2.1 Q2.2 Q2.3 Q5.5 Q5.6 Q5.7 Q5.8 R16.2 U3.15 | length 8.3
  Signal 2 w0.254: v1(0.94,-5.8) 2.856,-3.884 v1(2.856,0.025)
  Bottom Layer w0.254: v1(0.94,-5.8) 1.113,-5.627 1.113,-5.361 1.35,-5.124 U3.15
OUT_W: C20.2 pad.3@4.5,-10.55 Q3.1 Q3.2 Q3.3 Q6.5 Q6.6 Q6.7 Q6.8 R18.2 U3.12 | length 10.1
  Signal 1 w0.254: v1(2.128,-5.891) 2.166,-5.853 2.604,-5.853 2.861,-5.596 3.254,-5.596 3.621,-5.229 v1(3.621,-4.3)
  Signal 2 w0.254: v1(2.698,1.593) 2.751,1.593 3.629,0.715 3.629,-1.827 3.621,-1.835 v1(3.621,-4.3)
  Bottom Layer w0.254: U3.12 3.043,-3.658 3.338,-3.658 3.338,-3.964 3.621,-4.247 v1(3.621,-4.3)
PWM_UH: U2.20 U3.22 | length 7.8
  Bottom Layer w0.127: U2.20 -4.55,-0.136 -4.55,-0.753 -5.065,-1.268 -5.065,-2.282 -4.276,-3.072 -2.052,-3.072 -1.13,-2.15 U3.22
PWM_UL: U2.2 U3.1 | length 7.1
  Signal 1 w0.127: v1(-1.202,4.828) -1.6,4.43 -1.6,0.661 v1(-0.514,-0.425)
  Bottom Layer w0.127: U2.2 -1.854,4.591 -1.618,4.828 v1(-1.202,4.828) ; v1(-0.514,-0.425) -0.19,-0.425 U3.1
PWM_VH: U2.19 U3.23 | length 7.1
  Bottom Layer w0.127: U2.19 -3.854,-0.156 -4.143,-0.445 -4.143,-0.705 -4.746,-1.309 -4.746,-2.151 -4.069,-2.828 -2.308,-2.828 -1.13,-1.65 U3.23
PWM_VL: U2.13 U3.2 | length 2.2
  Bottom Layer w0.127: U2.13 -1.208,0.207 -0.928,-0.072 -0.77,-0.072 -0.544,0.154 0.026,0.154 0.35,-0.17 U3.2
PWM_WH: U2.18 U3.24 | length 6.4
  Bottom Layer w0.127: U2.18 -3.576,-0.5 -4.443,-1.368 -4.443,-1.997 -3.868,-2.572 -2.47,-2.572 -1.523,-1.625 -1.523,-1.517 -1.227,-1.222 -0.907,-1.222 U3.24
PWM_WL: U2.12 U3.3 | length 2.3
  Bottom Layer w0.127: U2.12 -0.761,0.561 -0.606,0.405 0.275,0.405 0.85,-0.17 U3.3
SNS_U: R13.2 R14.1 R19.2 U2.5 | length 7.4
  Bottom Layer w0.127: U2.5 -0.347,4.068 1.232,4.068 1.8,3.5 R13.2 ; R14.1 R13.2 ; R19.2 4.225,4.8 3.25,4.8 1.95,3.5 R13.2
SNS_V: R15.2 R16.1 R20.2 U2.9 | length 5.8
  Bottom Layer w0.127: U2.9 0.568,1.231 0.568,1.147 0.712,1.003 3.128,1.003 R16.1 3.575,1 R20.2 R15.2
SNS_W: R17.2 R18.1 R21.2 U2.8 | length 6.6
  Bottom Layer w0.127: U2.8 0.28,2.47 0.842,1.908 0.842,1.736 1.079,1.5 1.2,1.5 1.708,2.008 3.602,2.008 3.731,2.137 3.731,2.431 4.35,3.05 R17.2 R21.2
SNS_X: R13.1 R15.1 R17.1 U2.6 U2.10 | length 11.2
  Signal 1 w0.254: v1(1.148,3.564) 1.18,3.532 2.666,3.532 v1(2.698,3.5)
  Bottom Layer w0.127: U2.10 -0.177,1.39 -0.306,1.519 -0.306,1.79 -0.103,1.992 -0.103,2.097 -0.669,2.663 -0.669,2.916 -0.53,3.055 U2.6 -0.143,3.564 v1(1.148,3.564) ; v1(2.698,3.5) R13.1 3.1,3.5 3.337,3.736 3.337,3.852 3.672,4.188 4.007,4.523 4.879,4.523 5.01,4.392 5.01,3.54 5.5,3.05 R17.1 R15.1
SWCLK: pad.4@-5.7,0.15 U2.24 | length 1.6
  Bottom Layer w0.127: pad.4@-5.7,0.15 -5.7,0.278 -5.85,0.428 -5.85,1.35 -5.621,1.579 U2.24
SWDIO: pad.4@-5.7,-0.65 U2.23 | length 2.4
  Bottom Layer w0.127: pad.4@-5.7,-0.65 -5.145,-0.095 -5.145,0.345 -5.5,0.7 -5.5,0.913 -5.268,1.145 U2.23
VBAT: C1.2 C2.1 C4.2 C5.2 C6.2 C7.2 C8.2 C9.2 C10.2 C11.2 C12.2 C13.2 C14.2 C17.2 D2.2 D3.2 D4.2 pad.3@4.85,9.6 pad.4@-1.4,-10.8 Q1.5 Q1.6 Q1.7 Q1.8 Q2.5 Q2.6 Q2.7 Q2.8 Q3.5 Q3.6 Q3.7 Q3.8 U1.3 U3.4 | length 66.5
  Top Layer w0.254: v1(1.363,-0.314) 1.4,-0.277 C8.2
  Top Layer w0.5: C2.1 -3.375,5.75 -2.8,5.175 -2.8,4.335 -2.765,4.3 -1.935,4.3 -1.15,3.515 -1.15,0.85 -1.9,0.1 -1.9,-1.706
  Top Layer w1.2: C9.2 C10.2 C13.2 C14.2 ; C11.2 C12.2 C5.2 C6.2
  Signal 1 w0.45: v1(1.363,-0.314) 1.35,-0.314 v1(1.35,-0.8) 3.5,-0.8 4.85,0.55 4.85,8.4 ; v1@4.25,9 4.85,9 ; 4.85,8.3 v1(4.15,9) ; v1(4.15,9) 4.15,9.7 ; v1(4.15,9) v1(4.85,9.7) ; 4.15,9.7 v1(4.15,10.4) ; 4.15,9.7 v1(4.85,9.7) ; v1(4.15,10.4) 4.85,10.4 ; v1(4.15,10.4) v1(4.85,9.7) ; 4.85,8.4 4.95,8.4 v1(5.55,9) ; 4.85,8.4 4.85,9 ; 4.85,9 v1(4.85,9.7) ; 4.85,9 v1(5.55,9) ; v1(4.85,9.7) 5.55,9.7 ; v1(4.85,9.7) 4.85,10.4 ; v1(4.85,9.7) v1(5.55,10.4) ; v1(4.85,9.7) v1(5.55,9) ; 4.85,10.4 v1(5.55,10.4) ; v1(5.55,9) 5.55,9.7 ; 5.55,9.7 v1(5.55,10.4)
  Signal 2 w0.45: v1(-5.1,-2.85) -4.8,-3.15 -4.8,-4.75 -3.752,-5.798 v1(-2.15,-5.798)
  Bottom Layer w0.254: v1(-5.1,-2.85) -5.1,-2.903 -5,-3.003 D2.2 ; v1(-2.15,-5.798) v1(-2.15,-5.798) -1.15,-5.8 -0.615,-6.335 -0.615,-6.71 D3.2 ; pad.4@-1.397,-10.797 -1.397,-9.402 -0.623,-8.628 -0.623,-8.373 -0.425,-8.175 D3.2@-0.425,-6.875 ; U3.4 1.355,-0.46 1.355,0.495 C17.2 ; C7.2 C7.2@3.55,8.1 ; v1(4.15,9) 4.15,8.947 4.073,8.87 4.073,8.623 C7.2@3.55,8.1 ; v1(5.55,9) 5.55,8.35 C4.2 C7.2@3.55,8.1
VSS_U_R: Q4.1 Q4.2 Q4.3 R10.2 U4.3 | length 21
  Top Layer w0.65: Q4.3@-5.67,-7.597 v1(-5.67,-7.075) Q4.1@-5.67,-6.558
  Signal 1 w0.254: v1(-5.67,-7.725) v1(-5.67,-7.075) v1(-5.67,-6.425) -4.5,-5.255 -4.5,-3.85 -3.35,-2.7 -3.35,4.05 -1.2,6.2 0.873,6.2 1.844,5.229 v1(1.894,5.229)
  Bottom Layer w0.127: U4.3 1.344,4.944 1.609,4.944 v1(1.894,5.229)
VSS_V_R: Q5.1 Q5.2 Q5.3 R11.2 U4.5 | length 14.1
  Top Layer w0.65: Q5.3@-1.47,-7.597 v1(-1.47,-7.075) Q5.1@-1.47,-6.558
  Signal 1 w0.254: v1(-1.47,-7.725) v1(-1.47,-7.075) v1(-1.47,-6.425) -1.47,-2.82 0,-1.35 0,0.25 -0.698,0.948 v1(-0.698,4.399)
pads on no net: U2.3 U2.4 U2.21 U2.22 U2.28 U2.30 U3.5 U3.7 U3.8 U3.21

## Polygon pours and split planes (outlines as drawn)
OUT_U on Top Layer "PolygonDirect" (solid, pour order 3): -2.4,-12 -2.4,-3.8 -6.5,-3.8 -6.5,-12
OUT_V on Top Layer "PolygonDirect" (solid, pour order 2): 1.9,-12 1.9,-3.8 -1.9,-3.8 -1.9,-12
OUT_W on Top Layer "PolygonDirect" (solid, pour order 0): 6.5,-12 6.5,-3.8 2.4,-3.8 2.4,-12
VBAT on Top Layer "PolygonDirect" (solid, pour order 9): 6.2,-3.5 6.2,11 3.1,11 3.1,-0.2 -6.2,-0.2 -6.2,-3.5
GND on Top Layer "NONET_L03_P-001" (solid, pour order 10): -6.2,11 -6.2,-1 4.735,-1 4.735,11
no net on Top Overlay "NONET_L03_P-001" (solid): -1.55,7.15 -1.55,2.7 2.55,2.7 2.55,7.15
VSS_V_R on Bottom Layer "PolygonDirect" (solid, pour order 6): -1.1,-8.05 -1.1,-6.05 -3.2,-6.05 -3.2,-7.55 -2.25,-7.55 -1.75,-8.05
VSS_U_R on Bottom Layer "PolygonDirect" (solid, pour order 5): -5.95,-8.05 -5.95,-6.05 -3.9,-6.05 -3.9,-7.55 -4.8,-7.55 -5.3,-8.05
GND on Bottom Layer "PolygonDirect" (solid, pour order 4): -5.35,-1.85 -6.2,-1.85 -6.2,-11.8 -1.85,-11.8 -1.85,-6.9 -3.2,-5.55 -4.05,-5.55 -5.35,-4.25
VBAT on Bottom Layer "PolygonDirect" (solid, pour order 16): 6.2,11 6.2,7.3 2.685,7.3 2.685,11 6.2,11
GND on Signal 1 "NONET_L03_P-001" (solid, pour order 18): -6.2,11 -6.2,-12 6.2,-12 6.2,11 -6.2,11
GND on Signal 2 "NONET_L03_P-001" (solid, pour order 17): -6.2,11 -6.2,-12 6.2,-12 6.2,11 -6.2,11

## Other copper
Top Layer:
  region net OUT_U: -3,-11.8 -3,-9.3 -6,-9.3 -6,-11.45 -5.65,-11.8
  region net OUT_W: 3,-11.8 3,-9.3 6,-9.3 6,-11.45 5.65,-11.8
Bottom Layer:
  region net VBAT: -1.65,-11.8 -1.9,-11.55 -1.9,-10.05 -1.65,-9.8 -1.15,-9.8 -0.9,-10.05 -0.9,-11.55 -1.15,-11.8
  region net ENC_I: 2.3,-11.55 2.55,-11.8 3.05,-11.8 3.3,-11.55 3.3,-10.05 3.05,-9.8 2.55,-9.8 2.3,-10.05
  region net ENC_B: 0.9,-11.55 1.15,-11.8 1.65,-11.8 1.9,-11.55 1.9,-10.05 1.65,-9.8 1.15,-9.8 0.9,-10.05
  region net GND: -3.3,-11.55 -3.05,-11.8 -2.55,-11.8 -2.3,-11.55 -2.3,-10.05 -2.55,-9.8 -3.05,-9.8 -3.3,-10.05
  region net ENC_A: -0.5,-11.55 -0.25,-11.8 0.25,-11.8 0.5,-11.55 0.5,-10.05 0.25,-9.8 -0.25,-9.8 -0.5,-10.05

## Silkscreen, mask and mechanical layers (free items; w line width, h text height)
Top Overlay:
  drawing of 8 lines, arcs and shapes, not listed
  text "V+" at 4.25,7.6 h0.7
  text "GND" at -5.8,7.55 h0.7
Bottom Overlay:
  lines w0.127: -6.2,-2.75 -4.9,-2.75 -4.6,-2.45 -4.6,0.35 -4.9,0.65 -6.146,0.65
  text "_" at -4.967,8.217 h0.7
  text "TX" at -2.617,7.65 h0.7
  text "RX" at -0.717,7.65 h0.7
  text "C" at -4.9,-0.1 h0.5
  text "D" at -4.9,-0.9 h0.5
  text "+" at -4.9,-1.7 h0.5
  text "_" at -4.9,-2.167 h0.5
  text "_" at -2.617,-9.408 h0.55
  text "B" at 1.733,-9.625 h0.55
  text "I" at 2.892,-9.625 h0.55
  text "+" at -1.067,-9.675 h0.55
  text "A" at 0.18,-9.675 h0.55
  text "v1.0" at -3.917,-10.85 h0.5
Board Outline:
  lines w0.1: -6.2,-11.592 -5.792,-12 -3.508,-12 -1.142,-12 1.142,-12 3.508,-12 5.792,-12 6.2,-11.592 6.2,11 -6.2,11 -6.2,-11.592

## Dimensions
-6.2,-11.592 to 6.2,-11.592 on Dimensions (Mech4)
-6.2,11 to -5.792,-12 on Dimensions (Mech4)